# EAGLE board Aegis PCB MB v95 (EAGLE 9.7.0), part 1 of 2
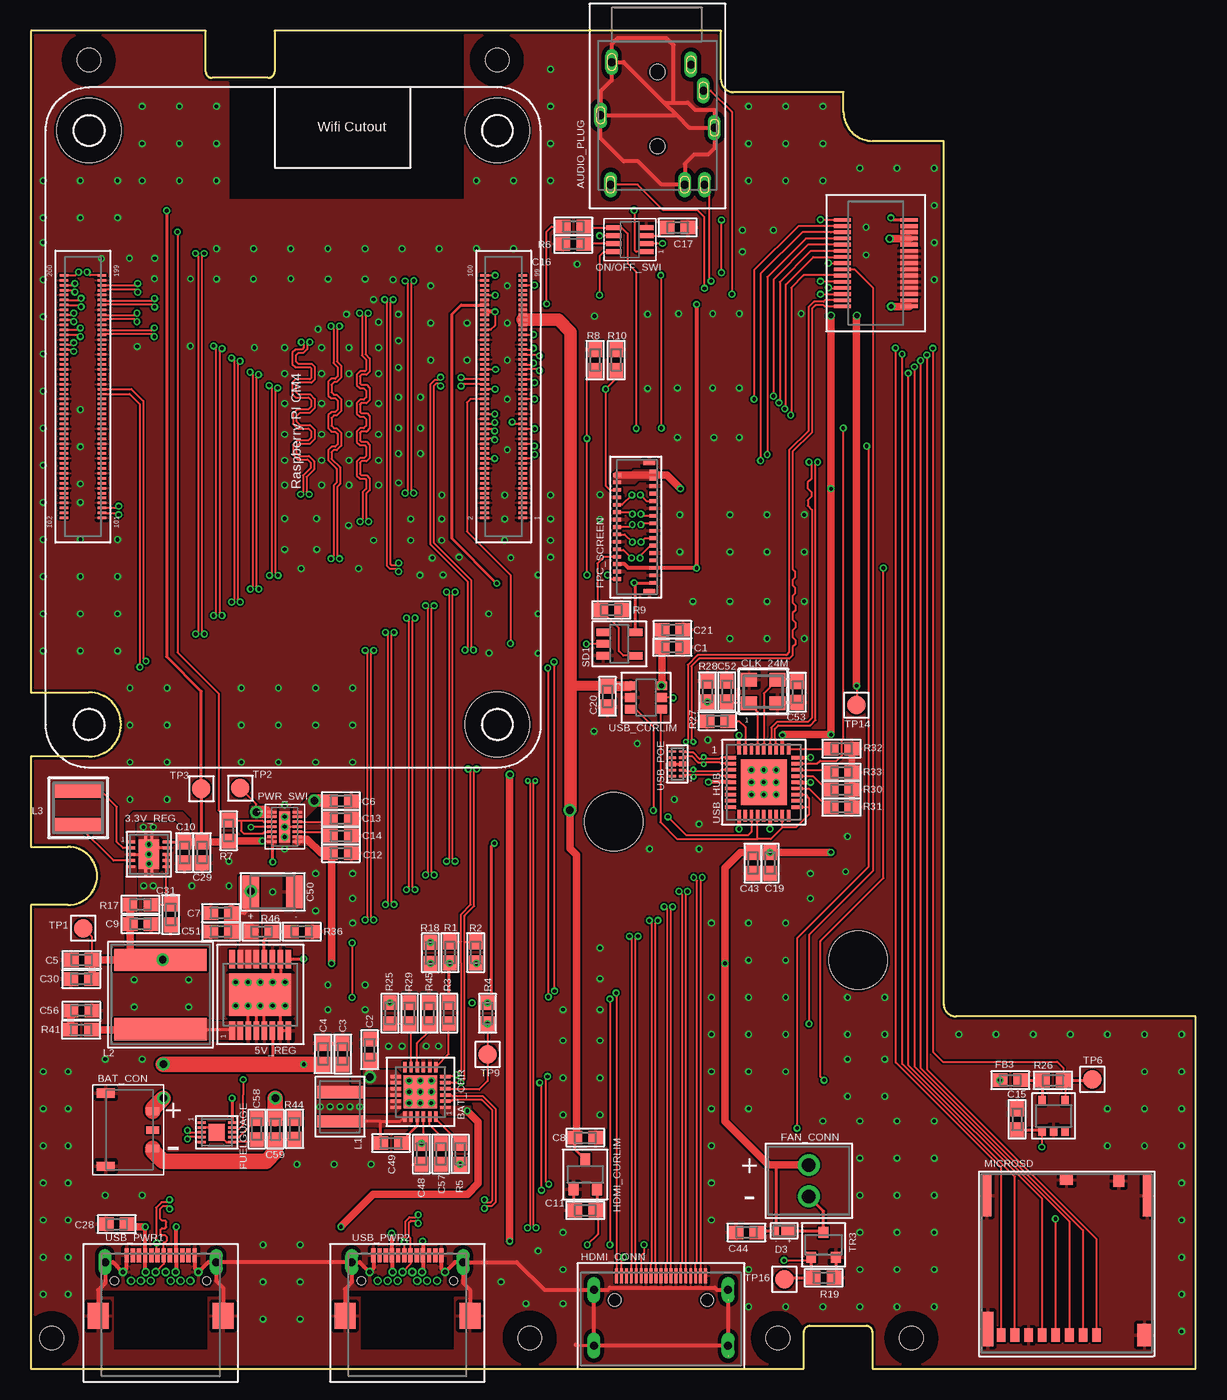
[diagram p0: board, top side]
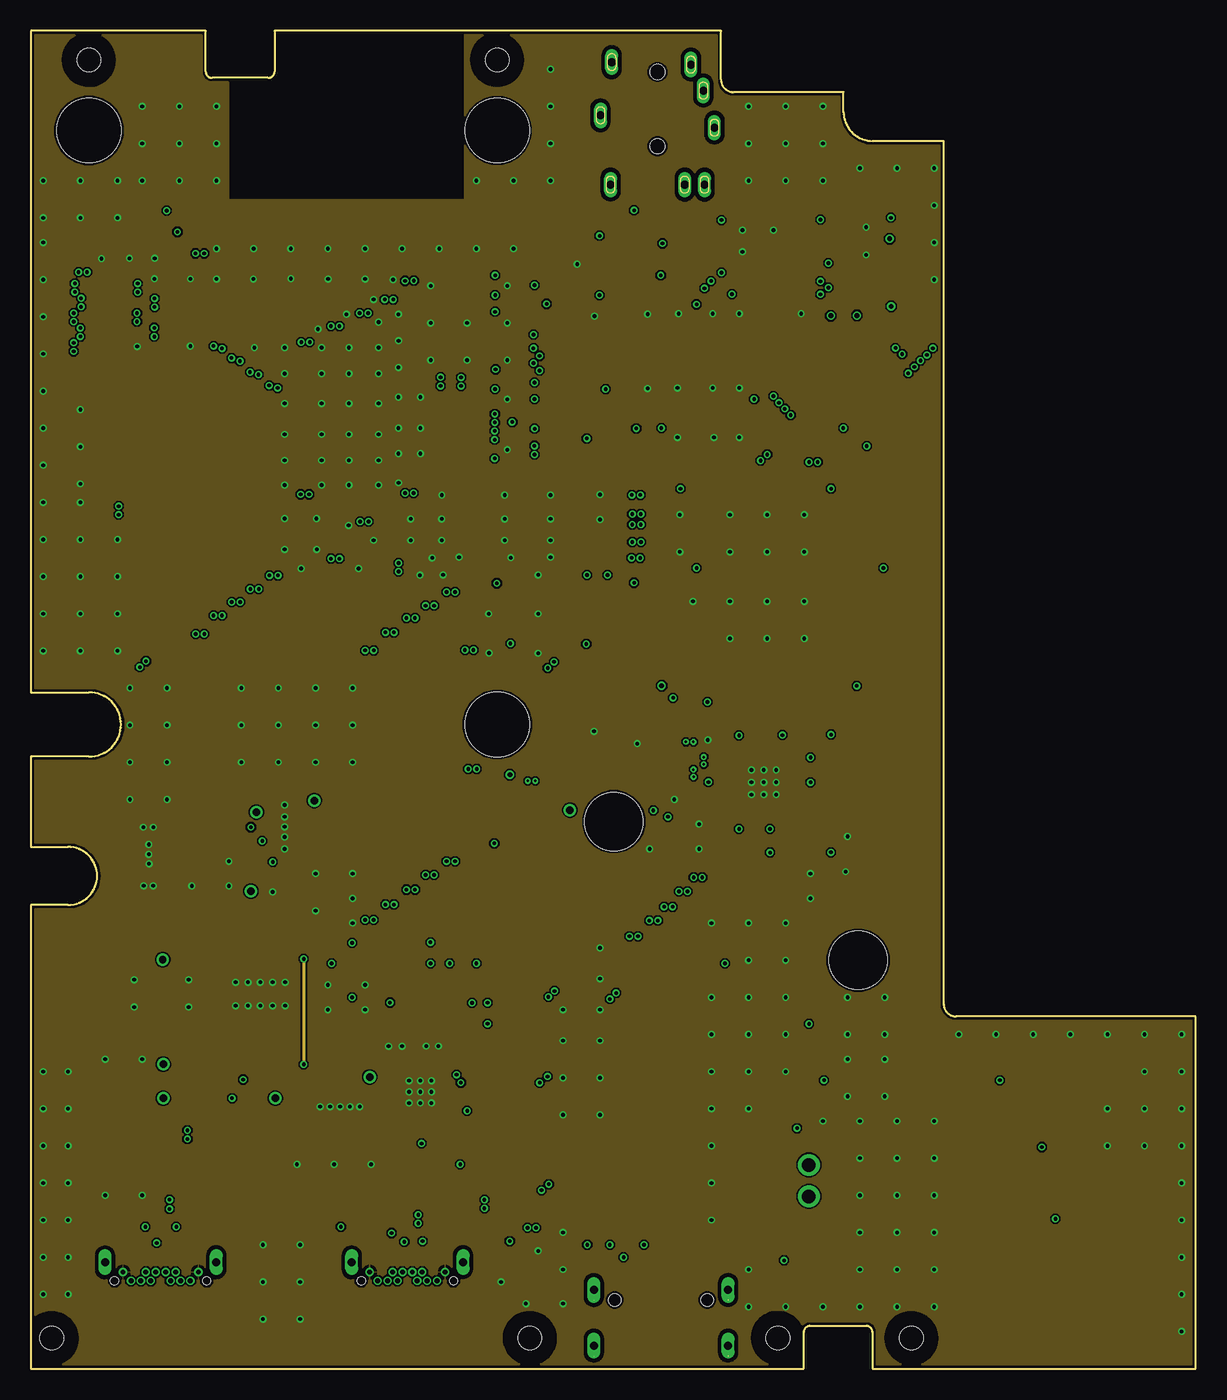
[diagram p1: board, inner layer Route2]
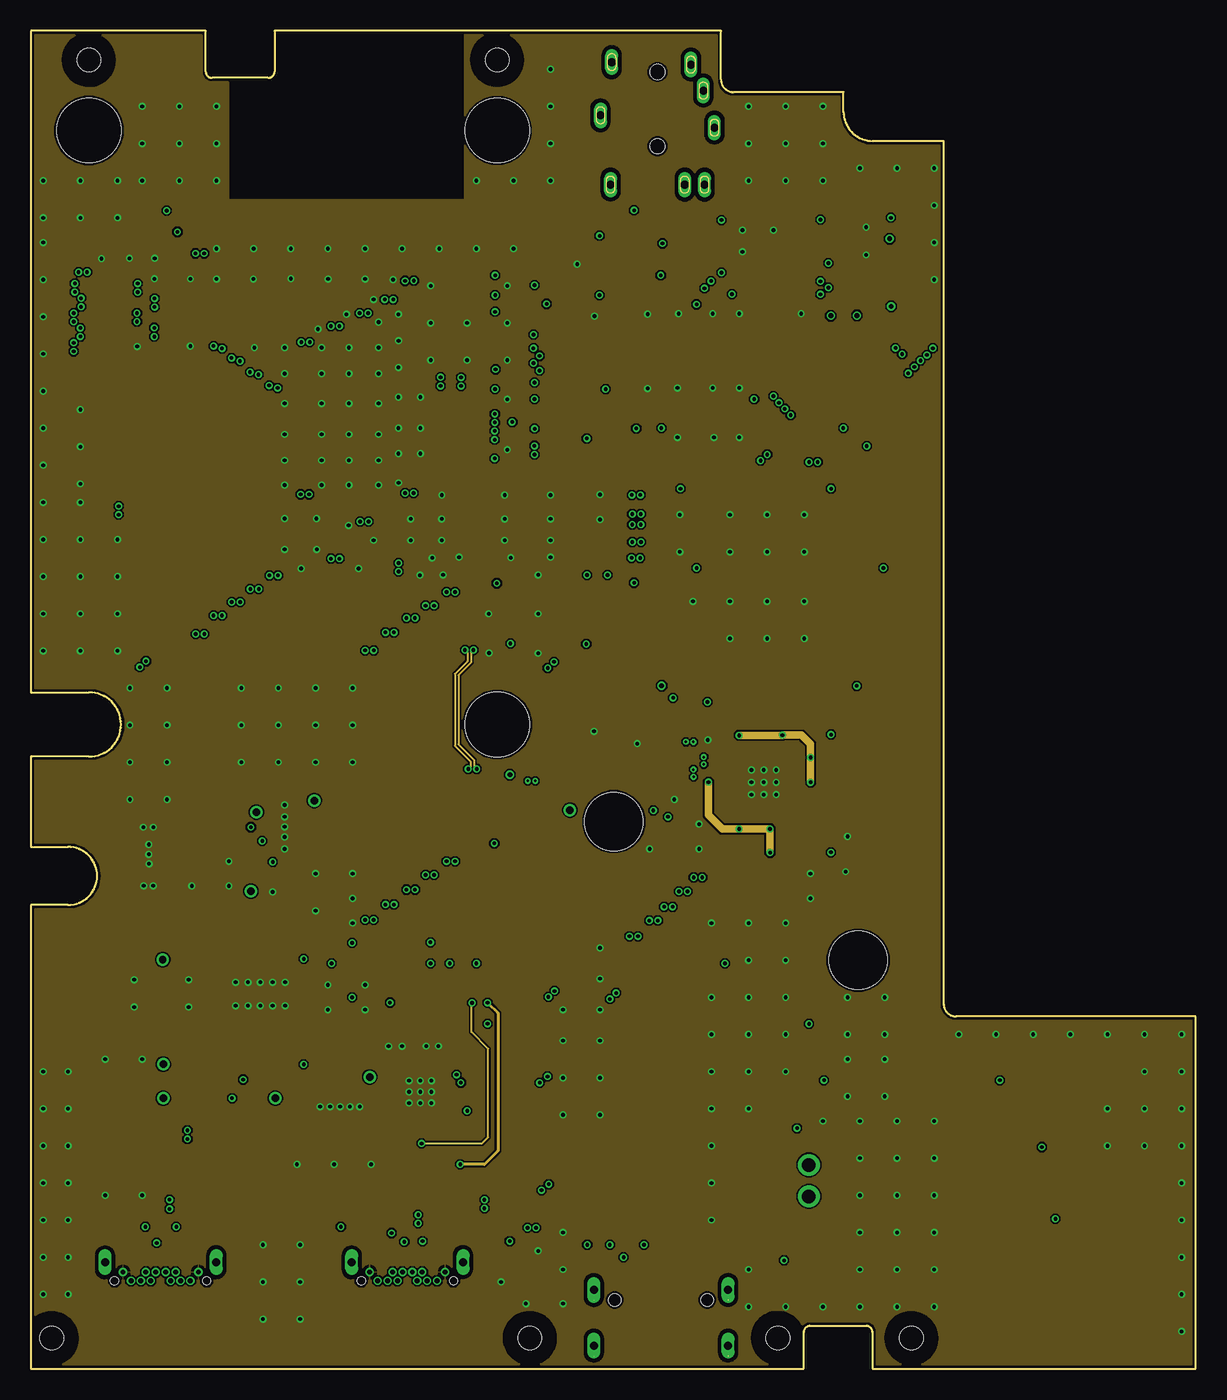
[diagram p2: board, inner layer Route15]
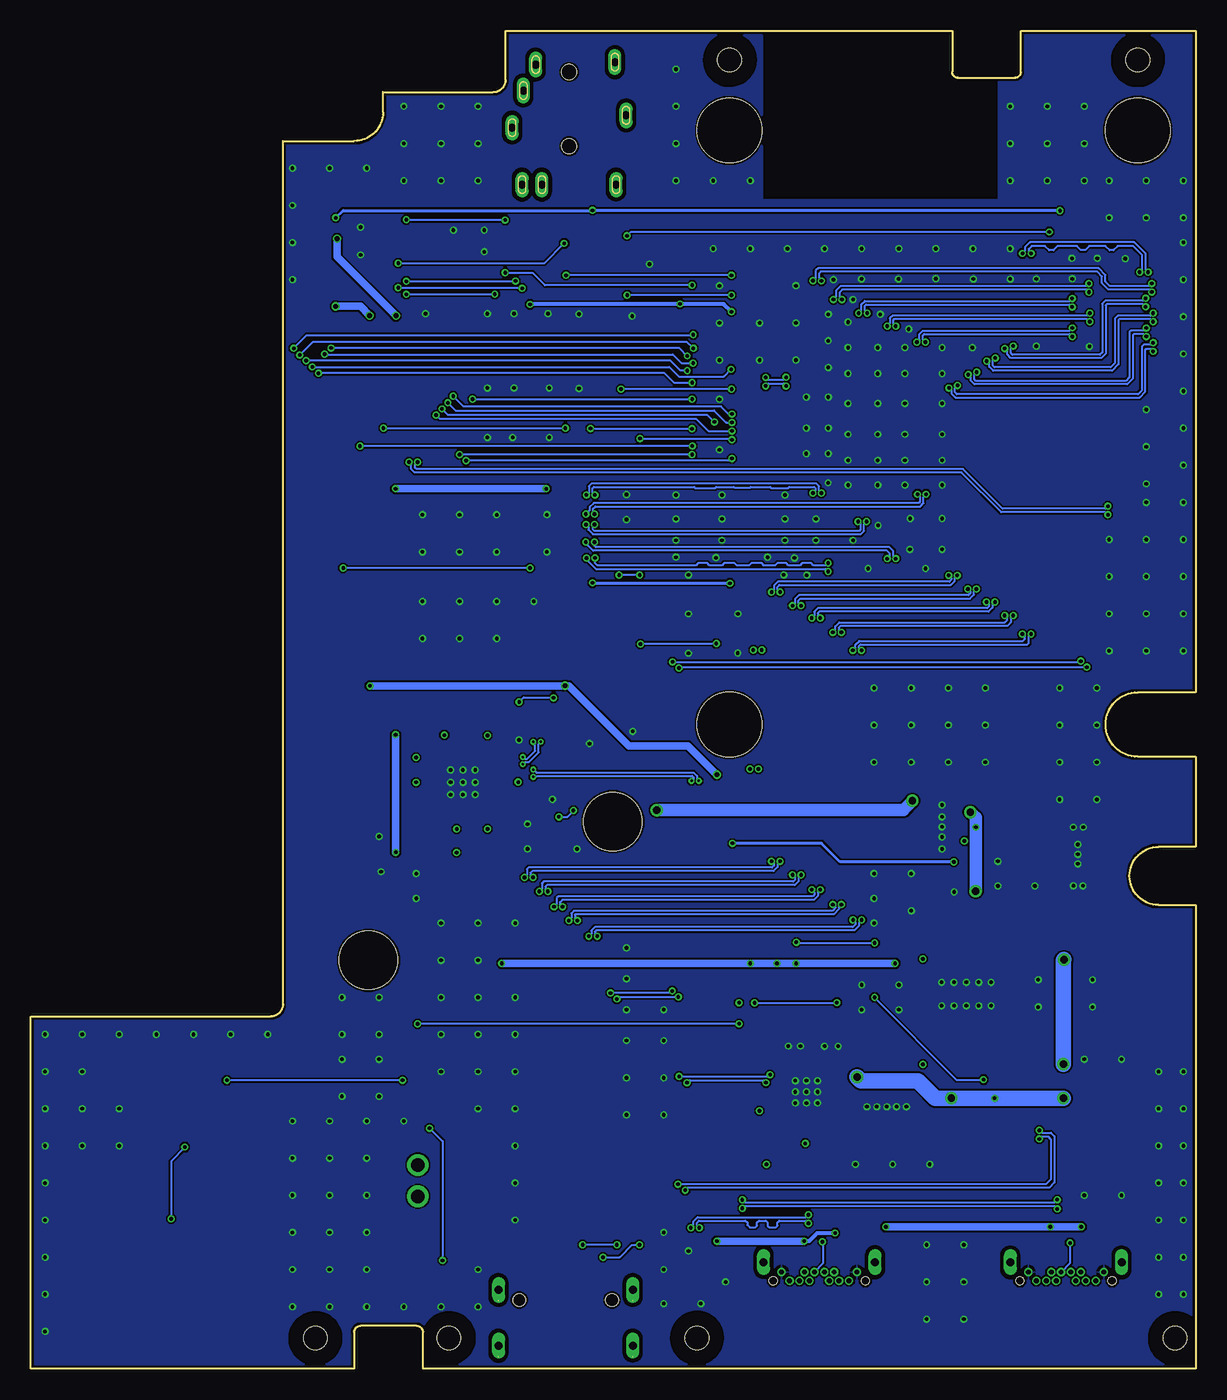
[diagram p3: board, bottom side, seen from below]

Size 94.14 x 108.1 mm. Coordinates in mm from the lower left corner, seen from the top.
Outline: 4.68,49.45 0,49.45 0,42.16 3,42.16 arc-180 3,37.46 0,37.46 0,0 62.46,0 62.46,2.95 arc-90 62.96,3.45 67.51,3.45 arc-90 68.01,2.95 68.01,0 94.14,0 94.14,28.46 74.77,28.46 arc-90 73.77,29.46 73.77,99.2 68.03,99.2 arc-90 65.68,101.55 65.68,103.15 56.78,103.15 arc-90 55.78,104.15 55.78,108.1 19.69,108.1 19.69,104.8 arc-90 19.19,104.3 14.64,104.3 arc-90 14.14,104.8 14.14,108.1 0,108.1 0,54.65 4.68,54.65 arc-180 4.68,49.45
Copper layers (1+2*15+16): Top / Route2 / Route15 / Bottom
Stack-up Default Layer Stack: Top User Defined 0.035mm / Dielectric-2 User Defined 1.6mm / Route2 User Defined 0.035mm / Dielectric-1 User Defined 0.15mm / Route15 User Defined 0.035mm / Dielectric-3 User Defined 0.2mm / Bottom User Defined 0.035mm
Design rules "jlcpcb *": minimum track width 5mil, minimum drill 0.2mm, track to track 5mil, track to pad 5mil, pad to pad 5mil, via to via 5mil, smd to smd 5mil, copper to edge 0.2mm, drill to drill 6mil, minimum pad ring 0.13mm, minimum via ring 0.13mm, stop-mask expansion 4mil, vias tented up to drill 0mil, thermal gap 10mil
Net classes: 1 PWR 1A: width 0.254 mm
Holes 1.9 mm at 37.68,105.75 4.68,105.75 60.38,2.46 40.32,2.46 1.68,2.46 71.15,2.46
Holes 4.7 mm at 66.86,33 47.11,44.2
Holes 5.2 mm at 4.68,100.05 37.69,52.05 37.68,100.05

## Footprints (pad centres in the part's own frame; a part is rotated, then mirrored left to right if it is on the bottom)
IC-TPS63001DRCR = smd 0.6 x 0.24: EN 1.4,-1; FB 1.4,1; GND 1.4,0.5; L1 -1.4,-0.5; L2 -1.4,0.5; PGND -1.4,0; PS/SYNC 1.4,-0.5; VIN -1.4,-1; VINA 1.4,0; VOUT -1.4,1 | smd 1.65 x 2.4: PGND_1 0,0 | smd 0.24 x 0.5: PGND_2 0.25,1.45; PGND_3 -0.25,1.45; PGND_4 0.25,-1.45; PGND_5 -0.25,-1.45
IC-TPS61032 = smd 1.5 x 0.45: EN 2.875,-2.275; FB 2.875,-0.325; GND 2.875,-0.975; LBI -2.925,-1.625; LBO 2.875,-1.625; NC 2.875,2.275; PGND1 -2.925,0.975; PGND2 -2.925,0.325; PGND3 -2.925,-0.325; SW1 -2.925,2.275; SW2 -2.925,1.625; SYNC -2.925,-2.275; VBAT -2.925,-0.975; VOUT1 2.875,1.625; VOUT2 2.875,0.975; VOUT3 2.875,0.325 | smd 3.4 x 5: PWRPAD 0,0
AUDIOPLUG-ASJ-192-Y-TR = drill 0.65 long: 1 2.7,0.6; 2 -3.8,-9.1; 3 -3.7,0.8; 4 3.7,-1.5; 5 2.2,-9.1; 6 3.8,-9.1; MS1 4.6,-4.5; MS2 -4.6,-3.5 | hole 1.2: 0,0; 0,-6
IC-BQ25895 = smd 0.28 x 0.85: /CE -0.25,-2; /QON 1.25,-2; BTST 0.25,2; DSEL -1.25,2; ILIM 0.25,-2; INT -1.25,-2; OTG -0.75,-2; PMID -0.75,2; REGN -0.25,2; SW1 1.25,2; SW2 0.75,2; TS 0.75,-2 | smd 0.85 x 0.28: BAT1 2,-1.25; BAT2 2,-0.75; D+ -2,0.75; D- -2,0.25; PGND1 2,0.75; PGND2 2,1.25; SCL -2,-0.75; SDA -2,-1.25; STAT -2,-0.25; SYS1 2,-0.25; SYS2 2,0.25; VBUS -2,1.25 | smd 2.7 x 2.7: PWRPAD 0,0
CONN_AUH03 = smd 1.05 x 0.6: 1 3.8,1.5; 2 3.8,-0.015; 3 3.8,-1.5 | smd 1.45 x 0.75: MP1 0,2.95; MP2 0,-2.95
CONN-AXK5F30347YG = smd 0.3 x 1.4: 1 -3.5,-2.7; 2 -3,-2.7; 3 -2.5,-2.7; 4 -2,-2.7; 5 -1.5,-2.7; 6 -1,-2.7; 7 -0.5,-2.7; 8 0,-2.7; 9 0.5,-2.7; 10 1,-2.7; 11 1.5,-2.7; 12 2,-2.7; 13 2.5,-2.7; 14 3,-2.7; 15 3.5,-2.7; 16 3.5,2.7; 17 3,2.7; 18 2.5,2.7; 19 2,2.7; 20 1.5,2.7; 21 1,2.7; 22 0.5,2.7; 23 0,2.7; 24 -0.5,2.7; 25 -1,2.7; 26 -1.5,2.7; 27 -2,2.7; 28 -2.5,2.7; 29 -3,2.7; 30 -3.5,2.7
CAP-603 = smd 1.2 x 1.1: A -0.85,0; C 0.85,0
CAP-TAN-1411 = smd 1.35 x 2.7: A -1.75,0; C 1.75,0
CLK-ECS-240 = smd 1.3 x 1.1: GND_1 -1.15,0.95; GND_2 1.15,-0.95; IN/OUT -1.15,-0.95; OUT/IN 1.15,0.95
DIODE-X3-WLB1608-2 = smd 1.035 x 0.69: A 0.293,0 | smd 0.385 x 0.69: C -0.619,0
CONN-282834-2 = drill 1.1: 1 -1.27,0; 2 1.27,0
FB-BLM18PG121SN1D = smd 1.2 x 1.1: A -0.85,0; C 0.85,0
CONN-FH35C-31S-0.3SHW = smd 0.3 x 0.65: 1 4.5,-1.5; 2 4.2,1.45; 3 3.9,-1.5; 4 3.6,1.45; 5 3.3,-1.5; 6 3,1.45; 7 2.7,-1.5; 8 2.4,1.45; 9 2.1,-1.5; 10 1.8,1.45; 11 1.5,-1.5; 12 1.2,1.45; 13 0.9,-1.5; 14 0.6,1.45; 15 0.3,-1.5; 16 0,1.45; 17 -0.3,-1.5; 18 -0.6,1.45; 19 -0.9,-1.5; 20 -1.2,1.45; 21 -1.5,-1.5; 22 -1.8,1.45; 23 -2.1,-1.5; 24 -2.4,1.45; 25 -2.7,-1.5; 26 -3,1.45; 27 -3.3,-1.5; 28 -3.6,1.45; 29 -3.9,-1.5; 30 -4.2,1.45; 31 -4.5,-1.5 | smd 0.4 x 0.95: M1 -5.2,-1.15; M2 5.2,-1.15
IC-MAX17055 = smd 0.2 x 0.65: AIN 0.4,1.225; ALRT 0,-1.225; BATT 0.8,-1.225; CSN -0.8,1.225; CSP -0.8,-1.225; NC 0.8,1.225; REG -0.4,-1.225; SCL 0,1.225; SDA -0.4,1.225; THRM 0.4,-1.225 | smd 1.4 x 1.3: EP 0,0
HDMI-2001-1-2-21-00-BK = smd 0.23 x 1.2: 1 3.6,0; 2 3.2,0; 3 2.8,0; 4 2.4,0; 5 2,0; 6 1.6,0; 7 1.2,0; 8 0.8,0; 9 0.4,0; 10 0,0; 11 -0.4,0; 12 -0.8,0; 13 -1.2,0; 14 -1.6,0; 15 -2,0; 16 -2.4,0; 17 -2.8,0; 18 -3.2,0; 19 -3.6,0 | drill 0.65 long: MP_1 -5.425,-1.15; MP_2 -5.425,-5.65; MP_3 5.425,-1.15; MP_4 5.425,-5.65 | hole 1: -3.745,-1.95; 3.745,-1.95
CURLIM-AP2331 = smd 0.8 x 1: GND -0.954,-1.2; IN 0,1.2; OUT 0.954,-1.2
IND-74438357022 = smd 0.98 x 3.7: A -1.185,0; C 1.185,0
IND-NRS8040T6R8NJGJ = smd 1.8 x 7.5: A -2.8,0; C 2.8,0
IND-NRS4010 = smd 1.2 x 3.7: A -1.4,0; C 1.4,0
MICROSD-5033981892_SD = smd 0.7 x 1.1: CLK 4.4,0; CMD 2.2,0; DAT0 6.6,0; DAT1 7.7,0; DAT2 0,0; DAT3 1.1,0; VDD 3.3,0; VSS 5.5,0 | smd 0.9 x 0.93: DL -1.79,-12.45 | smd 1.05 x 0.78: DS 2.425,-12.54 | smd 1.14 x 1.8: MP_1 -3.88,0 | smd 0.86 x 2.8: MP_2 8.78,-0.5 | smd 0.7 x 3.33: MP_3 -4.1,-11.265; MP_4 8.86,-11.265
IC-RT9742 = smd 0.6 x 0.8: /FLG 0.94,-1.25; EN 0.94,1.196; GND 0,-1.25; VIN -0.94,1.196; VOUT -0.94,-1.25
IC-LTC2954 = smd 0.4 x 1.22: 1 -0.975,-1.31; 2 -0.325,-1.31; 3 0.325,-1.31; 4 0.975,-1.31; 5 0.975,1.31; 6 0.325,1.31; 7 -0.325,1.31; 8 -0.975,1.31
IC-TPS22976 = smd 0.2 x 0.75: 1 -1.2,-1.025; 2 -0.8,-1.025; 3 -0.4,-1.025; 4 0,-1.025; 5 0.4,-1.025; 6 0.8,-1.025; 7 1.2,-1.025; 8 1.2,1.025; 9 0.8,1.025; 10 0.4,1.025; 11 0,1.025; 12 -0.4,1.025; 13 -0.8,1.025; 14 -1.2,1.025 | smd 2.5 x 0.9: 15 0,0
RES-603 = smd 1.2 x 1.1: A -0.85,0; C 0.85,0
SCHDIODE-SN74LVC1G17 = smd 1.1 x 0.6: 1 -1.3,0.95; 2 -1.3,0; 3 -1.3,-0.95; 4 1.3,-0.95; 5 1.3,0.95
TESTPOINT = smd 1.5 x 1.5: TP 0,0
TRAN-DMG2302UKQ = smd 0.8 x 0.9: D 0,1; G -1,-1; S 1,-1
RP_CM4 = smd 0.2 x 0.7: 1 7.3,18.54; 2 7.3,15.46; 3 6.9,18.54; 4 6.9,15.46; 5 6.5,18.54; 6 6.5,15.46; 7 6.1,18.54; 8 6.1,15.46; 9 5.7,18.54; 10 5.7,15.46; 11 5.3,18.54; 12 5.3,15.46; 13 4.9,18.54; 14 4.9,15.46; 15 4.5,18.54; 16 4.5,15.46; 17 4.1,18.54; 18 4.1,15.46; 19 3.7,18.54; 20 3.7,15.46; 21 3.3,18.54; 22 3.3,15.46; 23 2.9,18.54; 24 2.9,15.46; 25 2.5,18.54; 26 2.5,15.46; 27 2.1,18.54; 28 2.1,15.46; 29 1.7,18.54; 30 1.7,15.46; 31 1.3,18.54; 32 1.3,15.46; 33 0.9,18.54; 34 0.9,15.46; 35 0.5,18.54; 36 0.5,15.46; 37 0.1,18.54; 38 0.1,15.46; 39 -0.3,18.54; 40 -0.3,15.46; 41 -0.7,18.54; 42 -0.7,15.46; 43 -1.1,18.54; 44 -1.1,15.46; 45 -1.5,18.54; 46 -1.5,15.46; 47 -1.9,18.54; 48 -1.9,15.46; 49 -2.3,18.54; 50 -2.3,15.46; 51 -2.7,18.54; 52 -2.7,15.46; 53 -3.1,18.54; 54 -3.1,15.46; 55 -3.5,18.54; 56 -3.5,15.46; 57 -3.9,18.54; 58 -3.9,15.46; 59 -4.3,18.54; 60 -4.3,15.46; 61 -4.7,18.54; 62 -4.7,15.46; 63 -5.1,18.54; 64 -5.1,15.46; 65 -5.5,18.54; 66 -5.5,15.46; 67 -5.9,18.54; 68 -5.9,15.46; 69 -6.3,18.54; 70 -6.3,15.46; 71 -6.7,18.54; 72 -6.7,15.46; 73 -7.1,18.54; 74 -7.1,15.46; 75 -7.5,18.54; 76 -7.5,15.46; 77 -7.9,18.54; 78 -7.9,15.46; 79 -8.3,18.54; 80 -8.3,15.46; 81 -8.7,18.54; 82 -8.7,15.46; 83 -9.1,18.54; 84 -9.1,15.46; 85 -9.5,18.54; 86 -9.5,15.46; 87 -9.9,18.54; 88 -9.9,15.46; 89 -10.3,18.54; 90 -10.3,15.46; 91 -10.7,18.54; 92 -10.7,15.46; 93 -11.1,18.54; 94 -11.1,15.46; 95 -11.5,18.54; 96 -11.5,15.46; 97 -11.9,18.54; 98 -11.9,15.46; 99 -12.3,18.54; 100 -12.3,15.46; 101 7.3,-15.46; 102 7.3,-18.54; 103 6.9,-15.46; 104 6.9,-18.54; 105 6.5,-15.46; 106 6.5,-18.54; 107 6.1,-15.46; 108 6.1,-18.54; 109 5.7,-15.46; 110 5.7,-18.54; 111 5.3,-15.46; 112 5.3,-18.54; 113 4.9,-15.46; 114 4.9,-18.54; 115 4.5,-15.46; 116 4.5,-18.54; 117 4.1,-15.46; 118 4.1,-18.54; 119 3.7,-15.46; 120 3.7,-18.54; 121 3.3,-15.46; 122 3.3,-18.54; 123 2.9,-15.46; 124 2.9,-18.54; 125 2.5,-15.46; 126 2.5,-18.54; 127 2.1,-15.46; 128 2.1,-18.54; 129 1.7,-15.46; 130 1.7,-18.54; 131 1.3,-15.46; 132 1.3,-18.54; 133 0.9,-15.46; 134 0.9,-18.54; 135 0.5,-15.46; 136 0.5,-18.54; 137 0.1,-15.46; 138 0.1,-18.54; 139 -0.3,-15.46; 140 -0.3,-18.54; 141 -0.7,-15.46; 142 -0.7,-18.54; 143 -1.1,-15.46; 144 -1.1,-18.54; 145 -1.5,-15.46; 146 -1.5,-18.54; 147 -1.9,-15.46; 148 -1.9,-18.54; 149 -2.3,-15.46; 150 -2.3,-18.54; 151 -2.7,-15.46; 152 -2.7,-18.54; 153 -3.1,-15.46; 154 -3.1,-18.54; 155 -3.5,-15.46; 156 -3.5,-18.54; 157 -3.9,-15.46; 158 -3.9,-18.54; 159 -4.3,-15.46; 160 -4.3,-18.54; 161 -4.7,-15.46; 162 -4.7,-18.54; 163 -5.1,-15.46; 164 -5.1,-18.54; 165 -5.5,-15.46; 166 -5.5,-18.54; 167 -5.9,-15.46; 168 -5.9,-18.54; 169 -6.3,-15.46; 170 -6.3,-18.54; 171 -6.7,-15.46; 172 -6.7,-18.54; 173 -7.1,-15.46; 174 -7.1,-18.54; 175 -7.5,-15.46; 176 -7.5,-18.54; 177 -7.9,-15.46; 178 -7.9,-18.54; 179 -8.3,-15.46; 180 -8.3,-18.54; 181 -8.7,-15.46; 182 -8.7,-18.54; 183 -9.1,-15.46; 184 -9.1,-18.54; 185 -9.5,-15.46; 186 -9.5,-18.54; 187 -9.9,-15.46; 188 -9.9,-18.54; 189 -10.3,-15.46; 190 -10.3,-18.54; 191 -10.7,-15.46; 192 -10.7,-18.54; 193 -11.1,-15.46; 194 -11.1,-18.54; 195 -11.5,-15.46; 196 -11.5,-18.54; 197 -11.9,-15.46; 198 -11.9,-18.54; 199 -12.3,-15.46; 200 -12.3,-18.54
CURLIM-AP22653W6 = smd 0.7 x 0.9: EN 0.95,-1.25; GND 0,-1.25; ILIM 0,1.25; IN -0.95,-1.25; NFAULT 0.95,1.25; OUT -0.95,1.25
USBPORT-USB2514BT-I/M2 = smd 0.9 x 0.28: 1 -2.7,2; 2 -2.7,1.5; 3 -2.7,1; 4 -2.7,0.5; 5 -2.7,0; 6 -2.7,-0.5; 7 -2.7,-1; 8 -2.7,-1.5; 9 -2.7,-2; 19 2.7,-2; 20 2.7,-1.5; 21 2.7,-1; 22 2.7,-0.5; 23 2.7,0; 24 2.7,0.5; 25 2.7,1; 26 2.7,1.5; 27 2.7,2 | smd 0.28 x 0.9: 10 -2,-2.7; 11 -1.5,-2.7; 12 -1,-2.7; 13 -0.5,-2.7; 14 0,-2.7; 15 0.5,-2.7; 16 1,-2.7; 17 1.5,-2.7; 18 2,-2.7; 28 2,2.7; 29 1.5,2.7; 30 1,2.7; 31 0.5,2.7; 32 0,2.7; 33 -0.5,2.7; 34 -1,2.7; 35 -1.5,2.7; 36 -2,2.7 | smd 3.7 x 3.7: 37 0,0
POE_PROT-TPD4EUSB30DQAR = smd 0.565 x 0.2: D1+ -0.417,1; D1- -0.417,0.5; D2+ -0.417,-0.5; D2- -0.417,-1; NC_1 0.417,1; NC_2 0.417,0.5; NC_3 0.417,-0.5; NC_4 0.417,-1 | smd 0.565 x 0.4: GND_1 -0.417,0; GND_2 0.417,0
USBC-USB-C31-S-RA-CS1D-BK-T/R = smd 0.35 x 1.1: CC1 -0.75,1.35; D+ -0.25,1.35; D- 0.25,1.35; GND_1 -2.75,1.35; GND_2 2.75,1.35; RX2+ 2.25,1.35; RX2- 1.75,1.35; SBU1 0.75,1.35; TX1+ -2.25,1.35; TX1- -1.75,1.35; VBUS_1 -1.25,1.35; VBUS_2 1.25,1.35 | drill 0.4 pad 0.65: CC2 0.8,-0.7; D+_2 0.4,0; D-_2 -0.4,0; GND_3 3.05,0; GND_4 -3.05,0; RX1+ -2.4,-0.7; RX1- -1.6,-0.7; SBU2 -0.8,-0.7; TX2+ 2.4,-0.7; TX2- 1.6,-0.7; VBUS_3 1.2,0; VBUS_4 -1.2,0 | smd 1.7 x 2.1: MP_1 -5.05,-3.55; MP_2 5.05,-3.55 | drill 0.65 long: MP_3 4.5,0.8; MP_4 -4.5,0.8 | hole 0.65: -3.725,-0.7; 3.725,-0.7

## Placement (x,y rotation side)
3.3V_REG  IC-TPS63001DRCR  [IC-TPS63001DRCR]  9.53,41.56 0 top
5V_REG  IC-TP61032  [IC-TPS61032]  18.54,30.22 90 top
AUDIO_PLUG  AUDIOPLUG-ASJ-192-Y-TR  [AUDIOPLUG-ASJ-192-Y-TR]  50.64,104.78 0 top
BAT_CHR  IC-BQ25895  [IC-BQ25895]  31.47,22.36 180 top
BAT_CON  CONN-AUH03  [CONN_AUH03]  6.05,19.3 0 top
BOARD_CONN1  CONN-AXK5F30347YG  [CONN-AXK5F30347YG]  68.28,89.33 270 top
C1  100uF  [CAP-603]  51.84,58.31 180 top
C2  10uF  [CAP-603]  27.38,25.77 270 top
C3  10uF  [CAP-603]  25.18,25.42 270 top
C4  10uF  [CAP-603]  23.61,25.43 270 top
C5  10uF  [CAP-603]  4.09,33.03 0 top
C6  1uF  [CAP-603]  25.05,45.86 180 top
C7  10uF  [CAP-603]  15.37,36.81 0 top
C8  0.1uF  [CAP-603]  44.8,18.66 180 top
C9  10uF  [CAP-603]  8.87,35.92 180 top
C10  10uF  [CAP-603]  12.42,41.7 90 top
C11  0.1uF  [CAP-603]  44.8,12.79 0 top
C12  1uF  [CAP-603]  25.05,41.65 180 top
C13  220pF  [CAP-603]  25.05,44.45 180 top
C14  470pF  [CAP-603]  25.05,43.05 0 top
C15  10uF  [CAP-603]  79.7,20.14 270 top
C16  1uF  [CAP-603]  43.83,90.89 0 top
C17  0.32uF  [CAP-603]  52.26,92.21 180 top
C19  10uF  [CAP-603]  59.74,40.85 90 top
C20  10uF  [CAP-603]  46.6,54.32 90 top
C21  10uF  [CAP-603]  51.85,59.7 180 top
C28  1uF  [CAP-603]  6.93,11.67 0 top
C29  10uF  [CAP-603]  13.83,41.7 90 top
C30  0.1uF  [CAP-603]  4.07,31.48 0 top
C31  0.1uF  [CAP-603]  11.3,36.69 90 top
C43  0.1uF  [CAP-603]  58.35,40.85 90 top
C44  0.1uF  [CAP-603]  57.83,11 0 top
C48  4.7uF  [CAP-603]  31.56,17.34 90 top
C49  47nF  [CAP-603]  29.11,18.22 180 top
C50  220uF  [CAP-TAN-1411]  19.53,38.52 0 top
C51  2.2uF  [CAP-603]  15.37,35.32 0 top
C52  27pF  [CAP-603]  56.23,54.72 270 top
C53  27pF  [CAP-603]  61.94,54.67 90 top
C56  0.1uF  [CAP-603]  4.08,28.93 0 top
C57  10uF  [CAP-603]  33.13,17.35 270 top
C58  0.47uF  [CAP-603]  18.26,19.36 270 top
C59  0.1uF  [CAP-603]  19.76,19.35 270 top
CLK_24M  CLK-ECS-240  [CLK-ECS-240]  59.19,54.72 0 top
D3  [DIODE-X3-WLB1608-2]  60.87,11.13 0 top
FAN_CONN  CONN-282834-2  [CONN-282834-2]  62.87,15.18 270 top
FB3  FB-BLM18PG121SN1D  [FB-BLM18PG121SN1D]  79.15,23.3 0 top
FPC_SCREEN  CONN-FH35C-31S-0.3SHW  [CONN-FH35C-31S-0.3SHW]  48.83,68.01 90 top
FUELGUAGE  IC-MAX17055  [IC-MAX17055]  15.02,19.09 90 top
HDMI_CONN  HDMI-2001-1-2-21-00-BK  [HDMI-2001-1-2-21-00-BK]  50.92,7.5 0 top
HDMI_CURLIM  CURLIM-AP2331  [CURLIM-AP2331]  44.8,15.69 0 top
L1  IND-74438357022  [IND-74438357022]  24.98,21.16 90 top
L2  IND-NRS8040T6R8NJGJ  [IND-NRS8040T6R8NJGJ]  10.47,30.22 270 top
L3  IND-NRS4010  [IND-NRS4010]  3.82,45.31 90 top
MICROSD  MICROSD-5033981892_SD  [MICROSD-5033981892_SD]  86.12,2.7 180 top
MICROSD_SWI  IC-RT9742  [IC-RT9742]  82.65,20.44 0 top
ON/OFF_SWI  IC-LTC2954  [IC-LTC2954]  48.41,91.22 90 top
PWR_SWI  IC-TPS22976  [IC-TPS22976]  20.51,43.78 270 top
R1  10K  [RES-603]  33.86,33.62 90 top
R2  10K  [RES-603]  35.94,33.62 90 top
R3  10K  [RES-603]  33.77,28.73 270 top
R4  10K  [RES-603]  36.91,28.72 270 top
R5  10K  [RES-603]  34.69,17.35 90 top
R6  100  [RES-603]  43.84,92.29 0 top
R7  10K  [RES-603]  15.98,43.47 90 top
R8  10K  [RES-603]  45.6,81.5 90 top
R9  10K  [RES-603]  46.9,61.3 0 top
R10  10K  [RES-603]  47.3,81.5 90 top
R17  100  [RES-603]  8.85,37.5 180 top
R18  10K  [RES-603]  32.29,33.6 270 top
R19  10K  [RES-603]  64.07,7.34 180 top
R25  10K  [RES-603]  29.01,28.72 90 top
R26  12K  [RES-603]  82.6,23.29 180 top
R27  12K  [RES-603]  55.48,52.32 180 top
R28  15K  [RES-603]  54.68,54.72 270 top
R29  10K  [RES-603]  30.6,28.72 270 top
R30  36K  [RES-603]  65.51,46.78 0 top
R31  36K  [RES-603]  65.51,45.38 0 top
R32  36K  [RES-603]  65.51,50.1 0 top
R33  36K  [RES-603]  65.51,48.17 0 top
R36  180K  [RES-603]  21.89,35.32 180 top
R41  47  [RES-603]  4.05,27.38 180 top
R44  0.01  [RES-603]  21.3,19.37 90 top
R45  120  [RES-603]  32.18,28.72 270 top
R46  1.65M  [RES-603]  18.63,35.31 180 top
SD1  SCHDIODE-SN74LVC1G17  [SCHDIODE-SN74LVC1G17]  47.56,58.57 0 top
TP1  TESTPOINT  [TESTPOINT]  4.23,35.59 0 top
TP2  TESTPOINT  [TESTPOINT]  16.92,46.91 0 top
TP3  TESTPOINT  [TESTPOINT]  13.77,46.86 0 top
TP6  TESTPOINT  [TESTPOINT]  85.78,23.36 0 top
TP9  TESTPOINT  [TESTPOINT]  36.91,25.4 0 top
TP14  TESTPOINT  [TESTPOINT]  66.72,53.61 0 top
TP16  TESTPOINT  [TESTPOINT]  60.89,7.21 0 top
TR3  [TRAN-DMG2302UKQ]  64.06,10 0 top
U$9  RP_CM4  [RP_CM4]  21.2,76.05 270 top
USB_CURLIM  CURLIM-AP22653W6  [CURLIM-AP22653W6]  49.72,54.23 270 top
USB_HUB  USBPORT-USB2514BT-I/M2  [USBPORT-USB2514BT-I/M2]  59.23,47.38 0 top
USB_POE  POE_PROT-TPD4EUSB30DQAR  [POE_PROT-TPD4EUSB30DQAR]  52.25,48.87 180 top
USB_PWR1  USBC-USB-C31-S-RA-CS1D-BK-T/R  [USBC-USB-C31-S-RA-CS1D-BK-T/R]  10.48,7.8 0 top
USB_PWR2  USBC-USB-C31-S-RA-CS1D-BK-T/R  [USBC-USB-C31-S-RA-CS1D-BK-T/R]  30.43,7.8 0 top

## Library data of the parts
3.3V_REG 5V_REG AUDIO_PLUG BAT_CHR BAT_CON BOARD_CONN1 C1-C17 C19-C21 C28-C31 C43 C44 C48-C53 C56-C59 CLK_24M D3 FAN_CONN FB3 FPC_SCREEN FUELGUAGE HDMI_CONN HDMI_CURLIM L1-L3 MICROSD MICROSD_SWI ON/OFF_SWI PWR_SWI R1-R10 R17-R19 R25-R33 R36 R41 R44-R46 SD1 TP1-TP3 TP6 TP9 TP14 TP16 TR3 U$9 USB_CURLIM USB_HUB USB_POE USB_PWR1 USB_PWR2 = Personal

## Nets
AMP_EN: BOARD_CONN1.10 U$9.38
BAT: BAT_CHR.BAT1 BAT_CHR.BAT2 BAT_CON.1 C2.C C59.A FUELGUAGE.BATT
BITCLK_IN: BOARD_CONN1.2 U$9.49
BUT_DEC: BOARD_CONN1.5 U$9.44
BUT_INC: BOARD_CONN1.6 U$9.40
BUT_MISC: BOARD_CONN1.7 U$9.39
BUT_PWR: BOARD_CONN1.8 ON/OFF_SWI.2
CHG_LED: BAT_CHR.STAT BOARD_CONN1.9 R4.C TP9.TP
CSP: BAT_CON.3 C58.C C59.C FUELGUAGE.AIN FUELGUAGE.CSP FUELGUAGE.EP R44.A
D1_N: USB_HUB.3 USB_POE.D1- USB_PWR2.D- USB_PWR2.D-_2
D1_P: USB_HUB.4 USB_POE.D1+ USB_PWR2.D+ USB_PWR2.D+_2
D_N: BAT_CHR.D- USB_PWR1.D- USB_PWR1.D-_2
D_P: BAT_CHR.D+ USB_PWR1.D+ USB_PWR1.D+_2
DATA_IN: BOARD_CONN1.4 U$9.25
DCDC_EN: FPC_SCREEN.30 R8.A U$9.34
DSEL: BAT_CHR.DSEL R5.C
DSI1_C_N: FPC_SCREEN.15 U$9.187
DSI1_C_P: FPC_SCREEN.16 U$9.189
DSI1_D0_N: FPC_SCREEN.12 U$9.175
DSI1_D0_P: FPC_SCREEN.13 U$9.177
DSI1_D1_N: FPC_SCREEN.18 U$9.181
DSI1_D1_P: FPC_SCREEN.19 U$9.183
DSI1_D2_N: FPC_SCREEN.21 U$9.193
DSI1_D2_P: FPC_SCREEN.22 U$9.195
DSI1_D3_N: FPC_SCREEN.9 U$9.194
DSI1_D3_P: FPC_SCREEN.10 U$9.196
FAN: R19.C TP16.TP TR3.G U$9.31
FB: 5V_REG.FB R36.C R46.A
GAUGE_ALERT: FUELGUAGE.ALRT R18.A
GLOBAL_EN: U$9.99
GND: 3.3V_REG.GND 3.3V_REG.PGND 3.3V_REG.PGND_1 3.3V_REG.PGND_2 3.3V_REG.PGND_3 3.3V_REG.PGND_4 3.3V_REG.PGND_5 5V_REG.GND 5V_REG.LBI 5V_REG.LBO 5V_REG.PGND1 5V_REG.PGND2 5V_REG.PGND3 5V_REG.PWRPAD 5V_REG.SYNC AUDIO_PLUG.3 AUDIO_PLUG.5 AUDIO_PLUG.MS1 AUDIO_PLUG.MS2 BAT_CHR./CE BAT_CHR.OTG BAT_CHR.PGND1 BAT_CHR.PGND2 BAT_CHR.PWRPAD BAT_CON.MP1 BAT_CON.MP2 BOARD_CONN1.18 BOARD_CONN1.19 BOARD_CONN1.20 BOARD_CONN1.21 BOARD_CONN1.22 BOARD_CONN1.23 BOARD_CONN1.24 BOARD_CONN1.25 C1.A C2.A C3.A C4.A C5.A C6.A C7.A C8.A C9.A C10.A C11.A C12.A C13.A C14.C C15.A C16.A C17.A C19.A C20.A C21.A C28.A C29.A C30.A C31.A C43.A C44.A C48.A C50.C C51.A C52.A C53.A C56.C C57.C CLK_24M.GND_1 CLK_24M.GND_2 FPC_SCREEN.5 FPC_SCREEN.8 FPC_SCREEN.11 FPC_SCREEN.14 FPC_SCREEN.17 FPC_SCREEN.20 FPC_SCREEN.23 FPC_SCREEN.28 FPC_SCREEN.29 FPC_SCREEN.M1 FPC_SCREEN.M2 FUELGUAGE.CSN HDMI_CONN.1 HDMI_CONN.4 HDMI_CONN.7 HDMI_CONN.10 HDMI_CONN.13 HDMI_CONN.MP_1 HDMI_CONN.MP_2 HDMI_CONN.MP_3 HDMI_CONN.MP_4 HDMI_CURLIM.GND MICROSD.DL MICROSD.DS MICROSD.MP_1 MICROSD.MP_2 MICROSD.MP_3 MICROSD.MP_4 MICROSD.VSS MICROSD_SWI.GND ON/OFF_SWI.4 PWR_SWI.11 PWR_SWI.15 R8.C R9.C R10.C R19.A R27.C R28.A R29.A R30.C R31.C R32.C R33.C R36.A R44.C R45.A SD1.3 TR3.S U$9.1 U$9.2 U$9.7 U$9.8 U$9.13 U$9.14 U$9.22 U$9.23 U$9.32 U$9.33 U$9.42 U$9.43 U$9.52 U$9.53 U$9.59 U$9.60 U$9.65 U$9.66 U$9.71 U$9.74 U$9.98 U$9.101 U$9.107 U$9.108 U$9.113 U$9.114 U$9.119 U$9.120 U$9.125 U$9.126 U$9.131 U$9.132 U$9.137 U$9.138 U$9.144 U$9.150 U$9.155 U$9.156 U$9.161 U$9.162 U$9.167 U$9.168 U$9.173 U$9.174 U$9.179 U$9.180 U$9.185 U$9.186 U$9.191 U$9.192 U$9.197 U$9.198 USB_CURLIM.GND USB_HUB.37 USB_POE.GND_1 USB_POE.GND_2 USB_PWR1.GND_1 USB_PWR1.GND_2 USB_PWR1.GND_3 USB_PWR1.GND_4 USB_PWR1.MP_1 USB_PWR1.MP_2 USB_PWR1.MP_3 USB_PWR1.MP_4 USB_PWR2.GND_1 USB_PWR2.GND_2 USB_PWR2.GND_3 USB_PWR2.GND_4 USB_PWR2.MP_1 USB_PWR2.MP_2 USB_PWR2.MP_3 USB_PWR2.MP_4
HDMI0_CEC: HDMI_CONN.14 U$9.151
HDMI0_CK_N: HDMI_CONN.12 U$9.190
HDMI0_CK_P: HDMI_CONN.11 U$9.188
HDMI0_D0_N: HDMI_CONN.9 U$9.184
HDMI0_D0_P: HDMI_CONN.8 U$9.182
HDMI0_D1_N: HDMI_CONN.6 U$9.178
HDMI0_D1_P: HDMI_CONN.5 U$9.176
HDMI0_D2_N: HDMI_CONN.3 U$9.172
HDMI0_D2_P: HDMI_CONN.2 U$9.170
HDMI0_HOTPLUG: HDMI_CONN.19 U$9.153
HDMI0_SCL: HDMI_CONN.15 U$9.200
HDMI0_SDA: HDMI_CONN.16 U$9.199
HDMI_5V: C11.C HDMI_CONN.18 HDMI_CURLIM.OUT
HEADL: AUDIO_PLUG.2 BOARD_CONN1.12
HEADR: AUDIO_PLUG.4 BOARD_CONN1.13
ILIM: BAT_CHR.ILIM R45.C
INT: BAT_CHR.INT R3.C
LCD_EN: FPC_SCREEN.6 R10.A U$9.54
LCD_RST: SD1.2 U$9.50
LCD_RST_ADJ: FPC_SCREEN.24 R9.A SD1.4
N$1: BAT_CHR.BTST C49.A
N$2: BAT_CHR.VBUS C28.C USB_PWR1.VBUS_1 USB_PWR1.VBUS_2 USB_PWR1.VBUS_3 USB_PWR1.VBUS_4
N$3: C13.C PWR_SWI.12
N$4: BAT_CHR.TS R25.A R29.C
N$5: C14.A PWR_SWI.10
N$6: C56.A R41.C
N$7: C16.C ON/OFF_SWI.7
N$8: 3.3V_REG.EN 3.3V_REG.PS/SYNC 3.3V_REG.VINA C31.C R17.A
N$9: C17.C ON/OFF_SWI.3
N$11: BAT_CHR.PMID C57.A
N$20: FB3.C MICROSD_SWI.VIN R26.C
N$55: D3.A FAN_CONN.2 TR3.D
N$56: R32.A USB_HUB.28
N$57: R28.C USB_CURLIM.ILIM
N$58: R31.A USB_HUB.22
N$59: R30.A USB_HUB.24
N$61: C53.C CLK_24M.OUT/IN USB_HUB.32
N$62: C52.C CLK_24M.IN/OUT USB_HUB.33
N$63: 3.3V_REG.L1 L3.A
N$64: R33.A USB_HUB.25
N$65: R27.A USB_HUB.35
N$66: 3.3V_REG.L2 L3.C
N$67: C58.A FUELGUAGE.REG
N_EXTRST: U$9.100 USB_HUB.26
N_OCS1: USB_CURLIM.NFAULT USB_HUB.13 USB_HUB.17 USB_HUB.19 USB_HUB.21
N_PWRLED: BOARD_CONN1.1 U$9.95
N_RPIBOOT: U$9.93
PCIE_CLK_N: U$9.112
PCIE_CLK_NREQ: U$9.102
PCIE_CLK_P: U$9.110
PCIE_NRET: U$9.109
PCIE_RX_N: U$9.118
PCIE_RX_P: U$9.116
PCIE_TX_N: U$9.124
PCIE_TX_P: U$9.122
PWR1: USB_CURLIM.EN USB_HUB.12
PWR_EN: ON/OFF_SWI.6 PWR_SWI.3 PWR_SWI.5 R7.C
QON: BAT_CHR./QON
REGN: BAT_CHR.REGN C48.C R25.C
RP1.8: FPC_SCREEN.31 SD1.5 U$9.88 U$9.90
RP3.3: FB3.A FPC_SCREEN.26 FPC_SCREEN.27 R6.A U$9.78 U$9.84 U$9.86
RUN_PG: ON/OFF_SWI.8 U$9.92
SCL1: BAT_CHR.SCL FUELGUAGE.SCL R2.C U$9.56
SD_CLK: MICROSD.CLK U$9.57
SD_CMD: MICROSD.CMD U$9.62
SD_DAT0: MICROSD.DAT0 U$9.63
SD_DAT1: MICROSD.DAT1 U$9.67
SD_DAT2: MICROSD.DAT2 U$9.69
SD_DAT3: MICROSD.DAT3 U$9.61
SD_PWR: C15.C MICROSD.VDD MICROSD_SWI.VOUT
SD_PWR_ON: MICROSD_SWI.EN R26.A TP6.TP U$9.75
SDA1: BAT_CHR.SDA FUELGUAGE.SDA R1.C U$9.58
SHDN_SIG: ON/OFF_SWI.5 R6.C U$9.37
SNUB: 5V_REG.SW1 5V_REG.SW2 L2.C R41.A
SPK_SD: AUDIO_PLUG.6 BOARD_CONN1.11
SW: BAT_CHR.SW1 BAT_CHR.SW2 C49.C L1.A
SYS: 3.3V_REG.VIN 5V_REG.EN 5V_REG.VBAT BAT_CHR.SYS1 BAT_CHR.SYS2 C3.C C4.C C5.C C9.C C30.C L1.C L2.A R17.C TP1.TP
TD_N: BOARD_CONN1.15 USB_HUB.1 USB_POE.D2-
TD_P: BOARD_CONN1.14 USB_HUB.2 USB_POE.D2+
USB2_N: U$9.103 USB_HUB.30
USB2_P: U$9.105 USB_HUB.31
VBUS1: BOARD_CONN1.16 BOARD_CONN1.17 C1.C C21.C TP14.TP USB_CURLIM.OUT USB_PWR2.VBUS_1 USB_PWR2.VBUS_2 USB_PWR2.VBUS_3 USB_PWR2.VBUS_4
VREF3.3: BOARD_CONN1.26 BOARD_CONN1.27 BOARD_CONN1.28 BOARD_CONN1.29 C12.C C19.C C43.C C44.C D3.C FAN_CONN.1 FPC_SCREEN.1 FPC_SCREEN.2 FPC_SCREEN.3 FPC_SCREEN.4 PWR_SWI.8 PWR_SWI.9 R1.A R2.A R3.A R18.C USB_HUB.5 USB_HUB.10 USB_HUB.15 USB_HUB.23 USB_HUB.27 USB_HUB.29 USB_HUB.36
VREF5.0: C6.C C8.C C20.C HDMI_CURLIM.IN PWR_SWI.13 PWR_SWI.14 U$9.77 U$9.79 U$9.81 U$9.83 U$9.85 U$9.87 USB_CURLIM.IN
VSYS3.3: 3.3V_REG.FB 3.3V_REG.VOUT BOARD_CONN1.30 C10.C C29.C ON/OFF_SWI.1 PWR_SWI.6 PWR_SWI.7 R4.A R5.A R7.A TP3.TP
VSYS5.0: 5V_REG.VOUT1 5V_REG.VOUT2 5V_REG.VOUT3 C7.C C50.A C51.C PWR_SWI.1 PWR_SWI.2 PWR_SWI.4 R46.C TP2.TP
WORDSEL_IN: BOARD_CONN1.3 U$9.26